# Altium PCB DASHBOARD.PcbDoc (part 1 of 2)
Units mm, origin at the board's own origin, x right, y up, seen from the top; angles counter-clockwise.
Board outline 200 x 60 mm, 2 copper layers (Top Layer, Bottom Layer); 94 components, 71 nets, 344 pads, 49 vias.
Unrouted connection lines stored in the file: 10.
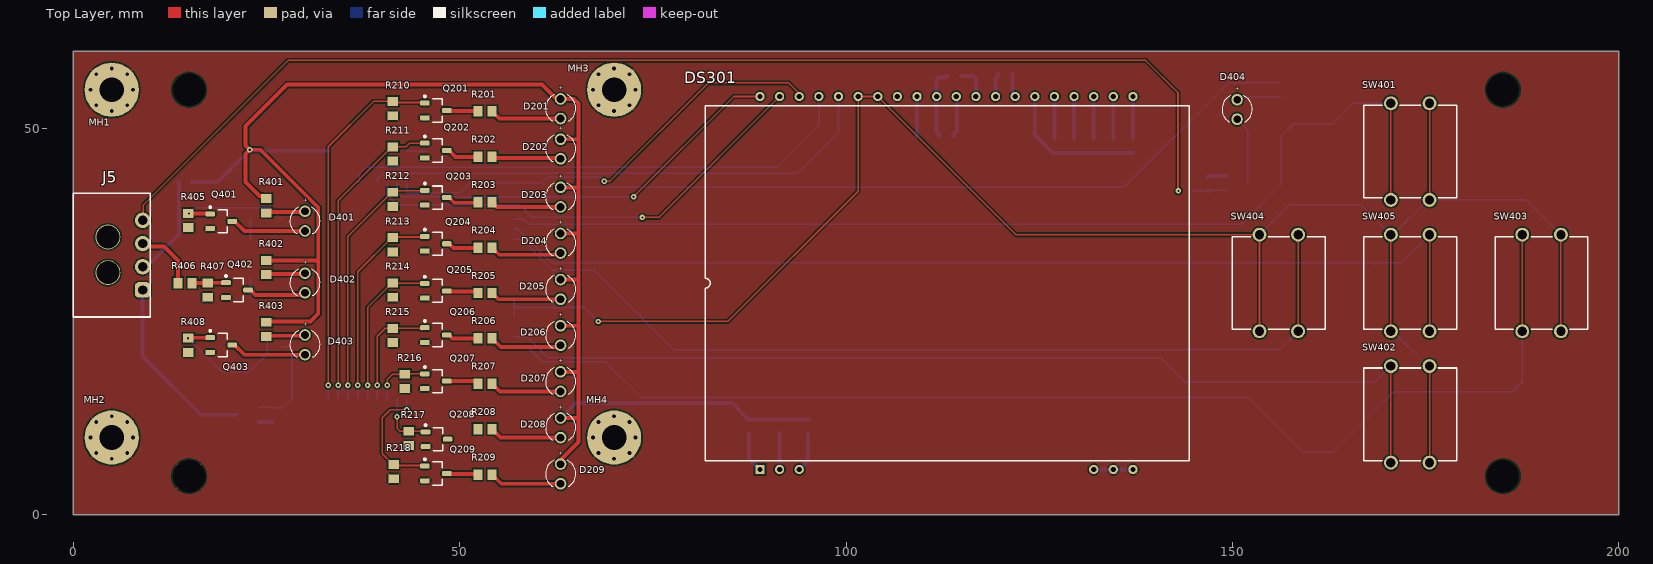
[diagram p0: Top Layer view]
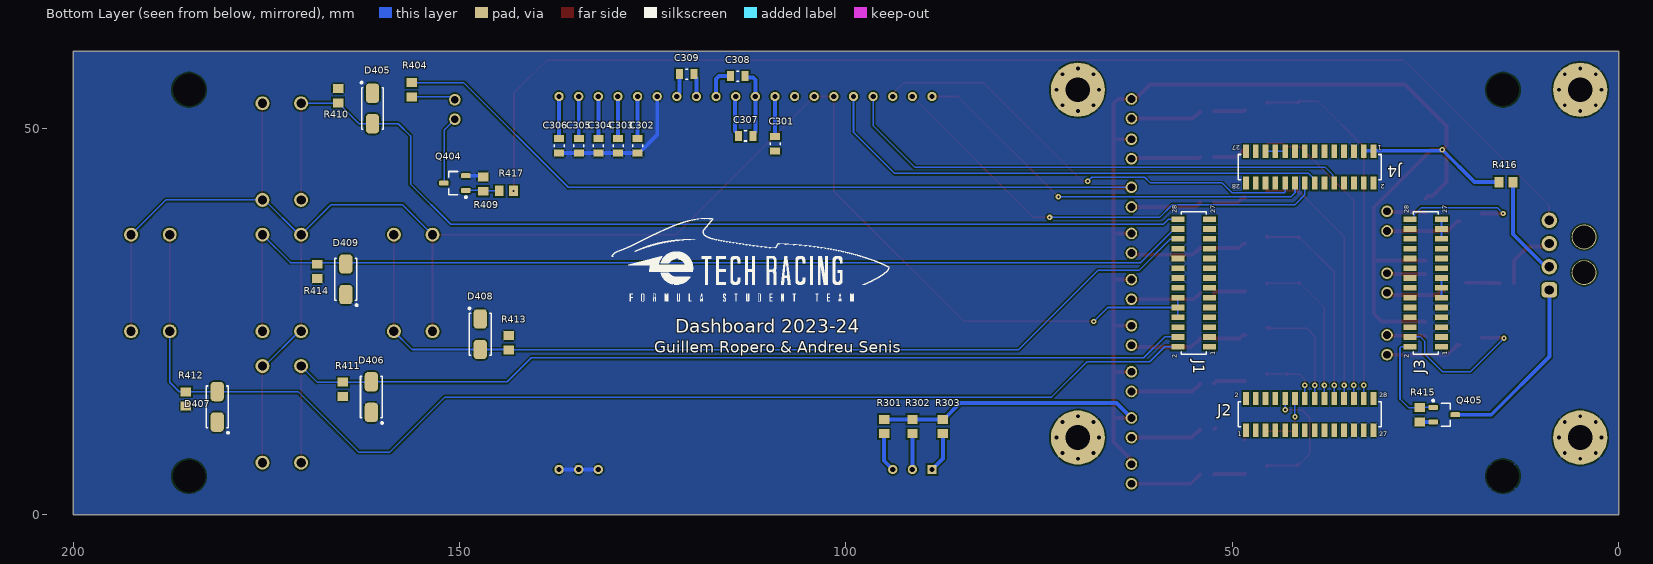
[diagram p1: Bottom Layer view, seen from below]
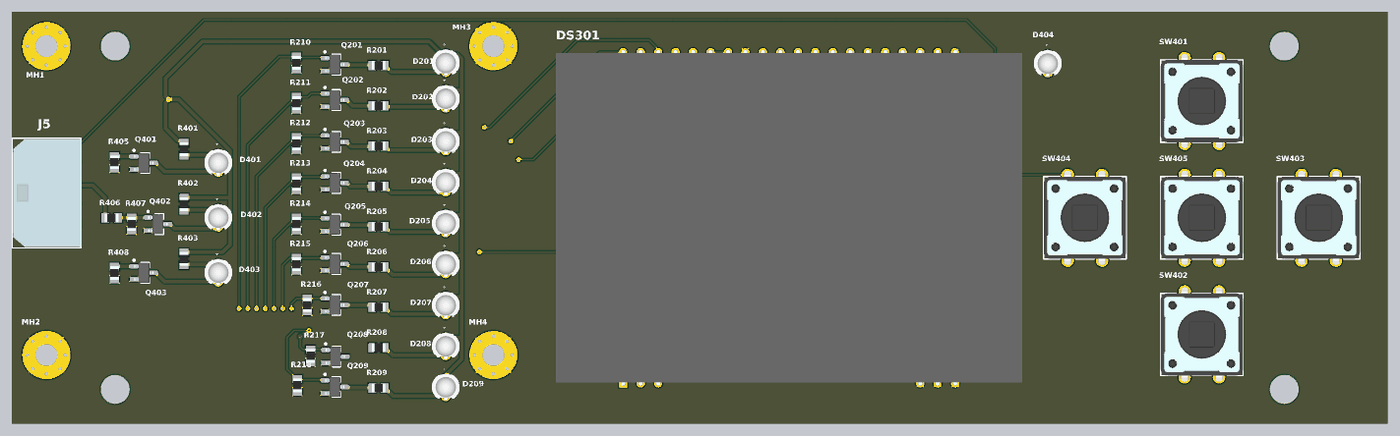
[diagram p2: 3D render of the assembled board from above, using the file's embedded part models]
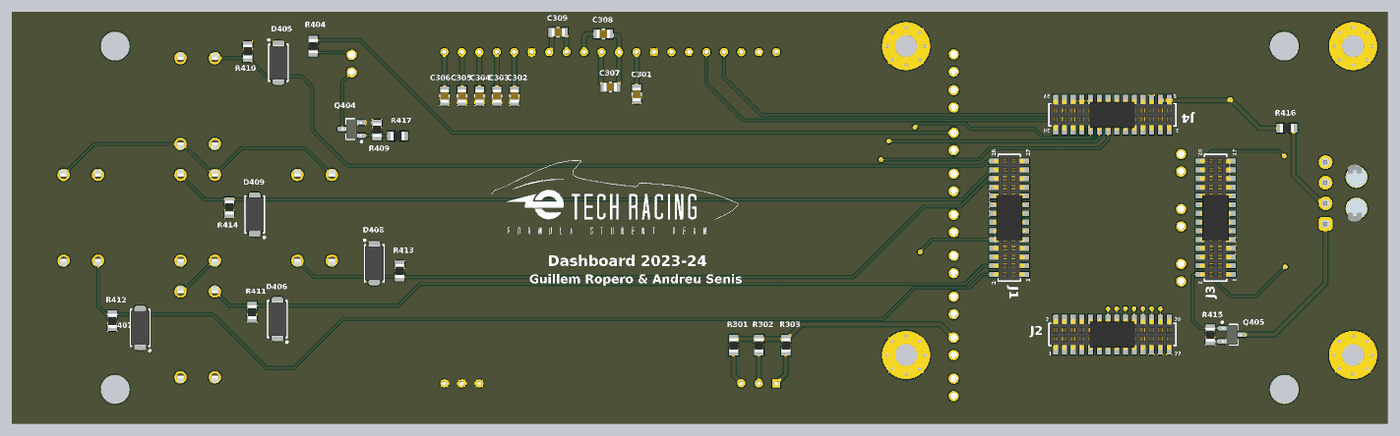
[diagram p3: 3D render of the assembled board from below, using the file's embedded part models]

## Layer stack, top to bottom
Top Solder: solder mask 0.0102, Solder Resist, Dk 3.5
Top Layer: signal copper 0.0356
Dielectric 1: dielectric 0.32, FR-4, Dk 4.8
Bottom Layer: signal copper 0.0356
Bottom Solder: solder mask 0.0102, Solder Resist, Dk 3.5

## Board outline
0,0 200,0 200,60 0,60

## Design rules (kind name [scope] priority, off if disabled: settings)
Clearance [All] p1: gap=0.2 ignorepadtopadclearanceinfootprint=FALSE
HoleSize [All] p1: absolutevalues=TRUE maxlimit=5 minlimit=0.3 maxpercent=80.000 minpercent=20.000
PlaneClearance [All] p1: clearance=0.5
PlaneConnect [All] p1: planeconnectstyle=Relief reliefexpansion=0.5 reliefentries=4 reliefconductorwidth=0.2 reliefairgap=0.2
PolygonConnect [All] p1: connectstyle=Relief reliefconductorwidth=0.2 reliefentries=4 polygonreliefangle="45 Angle" airgapwidth=0.2
RoutingVias [All] p1: holewidth=0.3 width=0.7 viastyle="Through Hole" minholewidth=0.3 minwidth=0.45 maxholewidth=2 maxwidth=3
SilkToSilkClearance [All] p1: silktosilkclearance=0
SolderMaskExpansion [All] p1: expansion=0.1 istentingtop=FALSE
UnRoutedNet [All] p1: checkbadconnections=TRUE
Width [All] p1: maxlimit=5 minlimit=0.1 preferedwidth=0.5
25 further rules are at their usual default settings.

## Classes and differential pairs
component class DASHBOARD: J1 J2 J3 J4 J5 MH1 MH2 MH3 MH4
component class Display: C301 C302 C303 C304 C305 C306 C307 C308 C309 DS301 R301 R302 R303
component class Peripherals: D401 D402 D403 D404 D405 D406 D407 D408 D409 Q401 Q402 Q403 Q404 Q405 R401 R402 R403 R404 R405 R406 R407 R408 R409 R410 R411 R412 R413 R414 R415 R416 R417 SW401 SW402 SW403 SW404 SW405
component class Bargraph: D201 D202 D203 D204 D205 D206 D207 D208 D209 Q201 Q202 Q203 Q204 Q205 Q206 Q207 Q208 Q209 R201 R202 R203 R204 R205 R206 R207 R208 R209 R210 R211 R212 R213 R214 R215 R216 R217 R218

## Components (designator, comment, footprint, x,y, rotation, side; value= is the part's Value field where it differs from the comment)
C301 "885012207103" C0805FNPC-R 109.172,48.006 r90 bottom
C302 "885012207103" C0805FNPC-R 126.952,47.752 r90 bottom
C303 "885012207103" C0805FNPC-R 129.492,47.752 r90 bottom
C304 "885012207103" C0805FNPC-R 132.032,47.752 r90 bottom
C305 "885012207103" C0805FNPC-R 134.572,47.752 r90 bottom
C306 "885012207103" C0805FNPC-R 137.112,47.752 r90 bottom
C307 "885012207103" C0805FNPC-R 112.982,49.022 r180 bottom
C308 "885012207103" C0805FNPC-R 113.998,56.769 r180 bottom
C309 "885012207103" C0805FNPC-R 120.602,57.023 r0 bottom
D201 "150080GS75000" LED-THT/WE/D3.9H10.5 63.072,52.537 r270 top locked
D202 "150080GS75000" LED-THT/WE/D3.9H10.5 63.072,47.33 r270 top locked
D203 "150080GS75000" LED-THT/WE/D3.9H10.5 63.072,41.107 r270 top locked
D204 "150080YS75000" LED-THT/WE/D3.9H10.5 63.072,35.138 r270 top locked
D205 "150080YS75000" LED-THT/WE/D3.9H10.5 63.072,29.169 r270 top locked
D206 "150080YS75000" LED-THT/WE/D3.9H10.5 63.072,23.2 r270 top locked
D207 "150080RS75000" LED-THT/WE/D3.9H10.5 63.072,17.231 r270 top locked
D208 "150080RS75000" LED-THT/WE/D3.9H10.5 63.072,11.262 r270 top locked
D209 "150080RS75000" LED-THT/WE/D3.9H10.5 63.072,5.293 r270 top locked
D401 "150080RS75000" LED-THT/WE/D3.9H10.5 30,38 r270 top
D402 "150080GS75000" LED-THT/WE/D3.9H10.5 30,30 r270 top
D403 "150080RS75000" LED-THT/WE/D3.9H10.5 30,22 r270 top
D404 "150080RS75000" LED-THT/WE/D3.9H10.5 150.606,52.451 r270 top
D405 "824501600" DTVS-DO-214AC 161.274,52.578 r90 bottom
D406 "824501600" DTVS-DO-214AC 161.417,15.24 r270 bottom
D407 "824501600" DTVS-DO-214AC 181.356,13.97 r270 bottom
D408 "824501600" DTVS-DO-214AC 147.32,23.368 r90 bottom
D409 "824501600" DTVS-DO-214AC 164.719,30.48 r270 bottom
DS301 "EA_DOGL128W-6" EA_DOGL128W-6 113,30 r0 top
J1 "62132821021" 62332821021 55,30 r90 bottom
J2 "62132821021" 62332821021 40,13 r180 bottom
J3 "62132821021" 62332821021 25,30 r90 bottom
J4 "62132821021" 62332821021 40,45 r0 bottom
J5 "436500400" J_MicroFit_1x4 5,33.6 r270 top
MH1 "Mounting_Hole_M3" Mounting_Hole_M3 5,55 r0 top
MH2 "Mounting_Hole_M3" Mounting_Hole_M3 5,10 r0 top
MH3 "Mounting_Hole_M3" Mounting_Hole_M3 70,55 r0 top locked
MH4 "Mounting_Hole_M3" Mounting_Hole_M3 70,10 r0 top locked
Q201 "CPH3455-TL-H" TRT-NCH-3/35-CPH 46.935,52.324 r0 top
Q202 "CPH3455-TL-H" TRT-NCH-3/35-CPH 46.935,47.142 r0 top
Q203 "CPH3455-TL-H" TRT-NCH-3/35-CPH 46.935,41.046 r0 top
Q204 "CPH3455-TL-H" TRT-NCH-3/35-CPH 46.935,35.077 r0 top
Q205 "CPH3455-TL-H" TRT-NCH-3/35-CPH 46.935,28.981 r0 top
Q206 "CPH3455-TL-H" TRT-NCH-3/35-CPH 46.935,23.266 r0 top
Q207 "CPH3455-TL-H" TRT-NCH-3/35-CPH 46.935,17.297 r0 top
Q208 "CPH3455-TL-H" TRT-NCH-3/35-CPH 47.028,9.783 r0 top
Q209 "CPH3455-TL-H" TRT-NCH-3/35-CPH 46.935,5.359 r0 top
Q401 "SQ2318BES-T1_GE3" TRT-NCH-3/35-CPH 19.163,37.983 r0 top
Q402 "SQ2318BES-T1_GE3" TRT-NCH-3/35-CPH 21.209,29.083 r0 top
Q403 "SQ2318BES-T1_GE3" TRT-NCH-3/35-CPH 19.163,21.983 r0 top
Q404 "SQ2318BES-T1_GE3" TRT-NCH-3/35-CPH 150.606,42.926 r0 bottom
Q405 "SQ2318BES-T1_GE3" TRT-NCH-3/35-CPH 22.606,12.954 r180 bottom
R201 "CRCW080550R0FKTA" R0805FTK 53.293,52.197 r0 top value=50R
R202 "CRCW080550R0FKTA" R0805FTK 53.293,46.323 r0 top value=50R
R203 "CRCW080550R0FKTA" R0805FTK 53.293,40.449 r0 top value=50R
R204 "CRCW080550R0FKTA" R0805FTK 53.293,34.576 r0 top value=50R
R205 "CRCW080550R0FKTA" R0805FTK 53.293,28.702 r0 top value=50R
R206 "CRCW080550R0FKTA" R0805FTK 53.293,22.828 r0 top value=50R
R207 "CRCW080550R0FKTA" R0805FTK 53.293,16.954 r0 top value=50R
R208 "CRCW080550R0FKTA" R0805FTK 53.293,11.081 r0 top value=50R
R209 "CRCW080550R0FKTA" R0805FTK 53.293,5.207 r0 top value=50R
R210 "CR0805-JW-103ELF" R0805FTK 41.355,52.561 r270 top
R211 "CR0805-JW-103ELF" R0805FTK 41.355,46.691 r270 top
R212 "CR0805-JW-103ELF" R0805FTK 41.355,40.82 r270 top
R213 "CR0805-JW-103ELF" R0805FTK 41.355,34.949 r270 top
R214 "CR0805-JW-103ELF" R0805FTK 41.355,29.079 r270 top
R215 "CR0805-JW-103ELF" R0805FTK 41.355,23.208 r270 top
R216 "CR0805-JW-103ELF" R0805FTK 42.926,17.272 r270 top
R217 "CR0805-JW-103ELF" R0805FTK 43.4,9.886 r270 top
R218 "CR0805-JW-103ELF" R0805FTK 41.482,5.596 r270 top
R301 "CRCW080550R0FKTA" R0805FTK 95.075,11.43 r90 bottom value=50R
R302 "CRCW080550R0FKTA" R0805FTK 91.392,11.43 r90 bottom value=50R
R303 "CRCW080550R0FKTA" R0805FTK 87.455,11.43 r90 bottom value=50R
R401 "CR0805-FX-1000ELF" R0805FTK 25,40 r270 top
R402 "CR0805-FX-1000ELF" R0805FTK 25,32 r270 top
R403 "CR0805-FX-1000ELF" R0805FTK 25,24 r270 top
R404 "CR0805-FX-1000ELF" R0805FTK 156.194,54.991 r270 bottom
R405 "CR0805-JW-103ELF" R0805FTK 14.91,38.083 r270 top
R406 "CR0805-FX-1000ELF" R0805FTK 14.478,29.972 r0 top
R407 "CR0805-JW-103ELF" R0805FTK 17.399,29.083 r90 top
R408 "CR0805-JW-103ELF" R0805FTK 14.91,21.954 r270 top
R409 "CR0805-JW-103ELF" R0805FTK 146.939,42.799 r90 bottom
R410 "CR0805-JW-103ELF" R0805FTK 165.719,54.229 r90 bottom
R411 "CR0805-JW-103ELF" R0805FTK 165.1,16.256 r270 bottom
R412 "CR0805-JW-103ELF" R0805FTK 185.42,14.986 r270 bottom
R413 "CR0805-JW-103ELF" R0805FTK 143.637,22.261 r90 bottom
R414 "CR0805-JW-103ELF" R0805FTK 168.402,31.496 r270 bottom
R415 "CR0805-JW-103ELF" R0805FTK 25.781,12.954 r270 bottom
R416 "CR0805-JW-102ELF" R0805FTK 14.605,43.053 r0 bottom
R417 "CR0805-JW-104ELF" R0805FTK 143.934,41.91 r0 bottom
SW401 "430456073736" SWITCH_12x12/4304x60737x6 173,47 r270 top
SW402 "430456073736" SWITCH_12x12/4304x60737x6 173,13 r270 top
SW403 "430456073736" SWITCH_12x12/4304x60737x6 190,30 r270 top
SW404 "430456073736" SWITCH_12x12/4304x60737x6 156,30 r90 top
SW405 "430456073736" SWITCH_12x12/4304x60737x6 173,30 r90 top

## Footprints (in the part's own frame and the unit in brackets; to place one, negate y for a bottom-side part, rotate by r counter-clockwise, add the part's x,y. Pads: shape width x height; smd on the part's side, far side on the other; paste and mask are expansions set on the pad)
62332821021 [mm] "Socket Header, Pitch 1.27 mm, SMT, Vertical, dual row, 28p"
  rect 0.74x1.7 smd: 1(-8.255,-2.05) 2(-8.255,2.05) 3(-6.985,-2.05) 4(-6.985,2.05) 5(-5.715,-2.05) 6(-5.715,2.05) 7(-4.445,-2.05) 8(-4.445,2.05) 9(-3.175,-2.05) 10(-3.175,2.05) 11(-1.905,-2.05) 12(-1.905,2.05) 13(-0.635,-2.05) 14(-0.635,2.05) 15(0.635,-2.05) 16(0.635,2.05) 17(1.905,-2.05) 18(1.905,2.05) 19(3.175,-2.05) 20(3.175,2.05) 21(4.445,-2.05) 22(4.445,2.05) 23(5.715,-2.05) 24(5.715,2.05) 25(6.985,-2.05) 26(6.985,2.05) 27(8.255,-2.05) 28(8.255,2.05)
  silkscreen extent -9.24,-1.62 9.24,1.63, body extent -9.09,-2.3 9.09,2.3, height 4.69
C0805FNPC-R [mm]
  rect 0.9x1.3 smd: 1(-0.95,0) 2(0.95,0)
  silkscreen extent -0.15,-0.65 0.15,0.65, body extent -1.03,-0.63 0.97,0.63, height 0.96
DTVS-DO-214AC [mm] "Molded Diode, 2-Leads, Body 5,11x2,67mm, IPC Medium Density"
  rrect50% 2.5x1.7 smd: 1(-1.975,0) 2(1.975,0)
  silkscreen extent -2.7,-1.4 3.47,1.53, body extent -2.56,-1.34 2.56,1.34, height 2.5
EA_DOGL128W-6 [mm]
  rect 1.2x1.2 hole 0.7: 1(-24.13,-24.13)
  round 1.2 hole 0.7: 2(-21.59,-24.13) 3(-19.05,-24.13) 18(19.05,-24.13) 19(21.59,-24.13) 20(24.13,-24.13) 21(24.13,24.13) 22(21.59,24.13) 23(19.05,24.13) 24(16.51,24.13) 25(13.97,24.13) 26(11.43,24.13) 27(8.89,24.13) 28(6.35,24.13) 29(3.81,24.13) 30(1.27,24.13) 31(-1.27,24.13) 32(-3.81,24.13) 33(-6.35,24.13) 34(-8.89,24.13) 35(-11.43,24.13) 36(-13.97,24.13) 37(-16.51,24.13) 38(-19.05,24.13) 39(-21.59,24.13) 40(-24.13,24.13)
  silkscreen extent -31.2,-23 31.4,22.93, body extent -33.9,-24.42 33.9,24.42, height 2.9
J_MicroFit_1x4 [mm]
  rrect50% 2x2 hole 1.2: 1(4.5,4)
  round 2 hole 1.2: 2(1.5,4) 3(-1.5,4) 4(-4.5,4)
  round 3.2 hole 3: ""(-2.35,-0.5) ""(2.26,-0.5)
  silkscreen extent -8,-5 8,5, body extent -7.83,-4.82 7.83,5.08, height 6.06
LED-THT/WE/D3.9H10.5 [mm] "THT Mono-color Round LED, 2-leads"
  round 1.5 hole 1: A(-1.27,0) K(1.27,0)
  silkscreen extent -1.79,-1.95 1.57,1.95, body extent -1.97,-1.95 1.85,1.95, height 10.55
Mounting_Hole_M3 [mm]
  round 7 hole 3.2: 1(0,0)
R0805FTK [mm] "Chip Resistor, 2-Leads, Body 2,00x1,25mm, IPC Medium Density"
  rect 1.15x1.35 smd: 1(-0.925,0) 2(0.925,0)
  body extent -1,-0.63 1,0.63, height 0.65
SWITCH_12x12/4304x60737x6 [mm] "12x12mm washable Tact Switch, THT version"
  round 1.8 hole 1.2: A1(-6.25,2.5) A2(6.25,2.5) B1(-6.25,-2.5) B2(6.25,-2.5)
  silkscreen extent -6,-6 6,6, body extent -6.99,-6 6.99,6, height 7.35
TRT-NCH-3/35-CPH [mm] "SOT23, 3-Leads, Body 2,90x2,80mm, Pitch 0,95mm, IPC Low Density"
  rrect50% 1.25x0.65 smd: D(1.425,0) G(-1.425,0.95) S(-1.425,-0.95)
  silkscreen extent -1.55,-1.5 0.8,1.95, body extent -1.4,-1.45 1.4,1.45, height 1.06

## Part data
C301 C302 C303 C304 C305 C306 C307 C308 C309: library part C1u-50V-0805FNPC-X7R, "Multilayer Ceramic Capacitor, Wcap-Csgp Series, 1 F, 10%, X7R, 50 V, 0805 [2012 Metric] Rohs Compliant: Yes", Capacitance=1uF, Case Code (Imperial)=0805, Case Code (Metric)=2012, Dielectric=X7R, Manufacturer 1="Wurth Electronics", Max Operating Temperature=85°C, Min Operating Temperature=-55°C, Supplier Part Number 1=1813523, Tolerance=10%, Voltage Rating=50V, .Creator=GP, Case/Package=0805, Category="Ceramic Capacitors", ComponentLink1Description=http://www.farnell.com/datasheets/1958501.pdf?src-supplier=Farnell, ComponentLink1URL=http://www.farnell.com/datasheets/1958501.pdf?src-supplier=Farnell, ComponentLink2Description=http://www.farnell.com/datasheets/1958501.pdf?src-supplier=Element14, ComponentLink2URL=http://www.farnell.com/datasheets/1958501.pdf?src-supplier=Element14, ComponentLink3Description=https://katalog.we-online.de/pbs/datasheet/885012107003.pdf?src-supplier=Digi-Key, ComponentLink3URL=https://katalog.we-online.de/pbs/datasheet/885012107003.pdf?src-supplier=Digi-Key, ComponentLink4Description=http://www.farnell.com/datasheets/1958501.pdf?src-supplier=Newark, ComponentLink4URL=http://www.farnell.com/datasheets/1958501.pdf?src-supplier=Newark, Length=0.079inch, Manufacturer Part Number 1=885012207103, Mount="Surface Mount", Packaging="Cut Tape", Pricing 1="50=0,27200, 250=0,25300, 500=0,22800, 1250=0,20100, 2500=0,17100 (GBP)", REACH SVHC=Unknown, RoHS=Yes, RoHS Compliant=Yes, Stock 1=5100, Supplier 1=RSComponents, Thickness=0.053inch, Voltage Rating (DC)=50V, Width=0.049inch
D201 D202 D203 D402: library part LEDGS-THT, "Led, Green, 520 Nm, 3.2 V, 30 Ma, 450 Mcd Rohs Compliant: Yes", Case Code (Imperial)=0805, Case Code (Metric)=2012, Color=Green, Forward Current=30mA, Forward Voltage=3.2V, Manufacturer 1="Wurth Electronics", Max Operating Temperature=85°C, Min Operating Temperature=-40°C, Package Quantity=4000, Supplier Part Number 1=8154221, Test Current=20mA, .Creator=GP, Case/Package=0805, Category=LEDs, ComponentLink1Description=Datasheet, ComponentLink1URL=https://www.we-online.com/catalog/datasheet/150080GS75000.pdf, ComponentLink2Description="Where buy it", ComponentLink2URL=https://katalog.we-online.de/en/led/WL-SMCW/150080GS75000, ComponentLink3Description=https://datasheet.ciiva.com/29563/150080gs75000-29563008.pdf?src-supplier=Digi-Key, ComponentLink3URL=https://datasheet.ciiva.com/29563/150080gs75000-29563008.pdf?src-supplier=Digi-Key, ComponentLink4Description=https://datasheet.ciiva.com/29279/759434-da-01-en-chipled-0805-w-kl-gruen-150080gs75000-29279039.pdf?src-supplier=Conrad, ComponentLink4URL=https://datasheet.ciiva.com/29279/759434-da-01-en-chipled-0805-w-kl-gruen-150080gs75000-29279039.pdf?src-supplier=Conrad, Dominant Wavelength=520nm, Height=0.7mm, Length=2mm, Lens Style=Clear,Rectangular, Luminous Intensity=450mcd, Manufacturer Part Number 1=150080GS75000, Mount="Surface Mount", Packaging="Cut Tape", Pricing 1="50=0,19300, 500=0,12900, 1000=0,12300, 2000=0,11700, 4000=0,11100 (USD)", REACH SVHC=Unknown, RoHS=Yes, RoHS Compliant=Yes, Stock 1=4350, Supplier 1=RSComponents, Viewing Angle=140°, Wavelength=520nm, Width=1.25mm
D204 D205 D206: library part LEDYS-THT, "2 V Yellow LED 2012 (0805) SMD, Wurth Elektronik WL-SMCW 150080YS75000", Case Code (Imperial)=0805, Case Code (Metric)=2012, Color=Yellow, Forward Current=30mA, Forward Voltage=2V, Manufacturer 1="Wurth Electronics", Max Operating Temperature=85°C, Min Operating Temperature=-40°C, Package Quantity=4000, Supplier Part Number 1=8154231, Test Current=20mA, .Creator=DR, Case/Package=0805, Category=LEDs, ComponentLink1Description=Datasheet, ComponentLink1URL=https://www.we-online.com/catalog/datasheet/150080YS75000.pdf, ComponentLink2Description="Where buy it", ComponentLink2URL=https://katalog.we-online.de/en/led/WL-SMCW/150080YS75000, ComponentLink3Description=https://datasheet.ciiva.com/23843/150080ys75000-23843256.pdf?src-supplier=Newark, ComponentLink3URL=https://datasheet.ciiva.com/23843/150080ys75000-23843256.pdf?src-supplier=Newark, ComponentLink4Description=https://datasheet.ciiva.com/29279/759438-da-01-en-chipled-0805-w-kl-gelb-150080ys75000-29279034.pdf?src-supplier=Conrad, ComponentLink4URL=https://datasheet.ciiva.com/29279/759438-da-01-en-chipled-0805-w-kl-gelb-150080ys75000-29279034.pdf?src-supplier=Conrad, ComponentLink5Description=https://datasheet.ciiva.com/22656/1911353-22656971.pdf?src-supplier=Element14, ComponentLink5URL=https://datasheet.ciiva.com/22656/1911353-22656971.pdf?src-supplier=Element14, ComponentLink6Description=https://datasheet.ciiva.com/29563/150080ys75000-29563019.pdf?src-supplier=Digi-Key, ComponentLink6URL=https://datasheet.ciiva.com/29563/150080ys75000-29563019.pdf?src-supplier=Digi-Key, ComponentLink7Description=https://datasheet.ciiva.com/29563/150080ys75000-29563020.pdf?src-supplier=Digi-Key, ComponentLink7URL=https://datasheet.ciiva.com/29563/150080ys75000-29563020.pdf?src-supplier=Digi-Key, ComponentLink8Description=https://datasheet.ciiva.com/29563/150080ys75000-29563021.pdf?src-supplier=Digi-Key, ComponentLink8URL=https://datasheet.ciiva.com/29563/150080ys75000-29563021.pdf?src-supplier=Digi-Key, Dominant Wavelength=590nm, Height=0.7mm, Length=2mm, Lens Style=Clear,Rectangular, Luminous Intensity=120mcd, Manufacturer Part Number 1=150080YS75000, Mount="Surface Mount", Packaging="Tape and Reel", Pricing 1="50=0,19300, 500=0,12900, 750=0,12300, 1500=0,11700, 3000=0,11100 (USD)", REACH SVHC=Unknown, RoHS=Yes, RoHS Compliant=Yes, Stock 1=2100, Supplier 1=RSComponents, Viewing Angle=140°, Wavelength=590nm, Width=1.25mm
D207 D208 D209 D401 D403 D404: library part LEDRS-THT, "0805(H=0.8mm) 红色 高亮 λD=625nm VF=2V IF=30mA PD=72mW", Case Code (Imperial)=0805, Case Code (Metric)=2012, Color=Red, Forward Current=30mA, Forward Voltage=2V, Manufacturer 1="Wurth Electronics", Max Operating Temperature=85°C, Min Operating Temperature=-40°C, Package Quantity=4000, Supplier Part Number 1=8154225P, Test Current=20mA, .Creator=DR, Case/Package=0805, Category=LEDs, ComponentLink1Description=Datasheet, ComponentLink1URL=https://www.we-online.com/catalog/datasheet/150080RS75000.pdf, ComponentLink2Description="Where buy it", ComponentLink2URL=https://katalog.we-online.de/en/led/WL-SMCW/150080RS75000, ComponentLink3Description=https://datasheet.ciiva.com/22656/150080rs75000-22656961.pdf?src-supplier=Element14, ComponentLink3URL=https://datasheet.ciiva.com/22656/150080rs75000-22656961.pdf?src-supplier=Element14, ComponentLink4Description=https://datasheet.ciiva.com/29279/759435-da-01-en-chipled-0805-w-kl-rot-150080rs75000-29279032.pdf?src-supplier=Conrad, ComponentLink4URL=https://datasheet.ciiva.com/29279/759435-da-01-en-chipled-0805-w-kl-rot-150080rs75000-29279032.pdf?src-supplier=Conrad, Dominant Wavelength=625nm, Height=0.7mm, Length=2mm, Lens Style=Clear,Rectangular, Luminous Intensity=150mcd, Manufacturer Part Number 1=150080RS75000, Mount="Surface Mount", Packaging="Tape and Reel", Pricing 1="50=0,19300, 500=0,12900, 1000=0,12300, 2000=0,11700, 4000=0,11100 (USD)", REACH SVHC=Unknown, RoHS=Yes, RoHS Compliant=Yes, Stock 1=1, Supplier 1=RSComponents, Viewing Angle=140°, Wavelength=625nm, Width=1.25mm
D405 D406 D407 D408 D409: library part DTVS-6V-DO-214AC, "TVS diode [Würth Elektronik] 824501600 TVS diode", Clamping Voltage=10.3V, Manufacturer="Wurth Electronics", Max Breakdown Voltage=7.02V, Max Operating Temperature=150°C, Min Operating Temperature=-65°C, Peak Pulse Current=38.8A, Peak Pulse Power=400W, Power Line Protection=No, Resistor Type=Zener, Reverse Standoff Voltage=6V, Supplier Part Number 1=710-824501600, .Creator=DO, Category="TVS Diodes", ComponentLink1Description="Where buy it", ComponentLink1URL=https://www.we-online.com/catalog/en/WE-TVSP?sq=824501600#824501600, ComponentLink2Description=http://www.farnell.com/datasheets/2036401.pdf?src-supplier=Element14, ComponentLink2URL=http://www.farnell.com/datasheets/2036401.pdf?src-supplier=Element14, ComponentLink3Description=https://katalog.we-online.de/pbs/datasheet/824501600.pdf?src-supplier=Digi-Key, ComponentLink3URL=https://katalog.we-online.de/pbs/datasheet/824501600.pdf?src-supplier=Digi-Key, Manufacturer Part Number=824501600, Min Breakdown Voltage=7.02V, Mount="Surface Mount", Number of Bidirectional Channels=1, Number of Pins=2, Packaging="Cut Tape", Polarity=Bidirectional, Pricing 1="1=0,28000, 10=0,26100, 50=0,26100, 100=0,23400, 500=0,20400, 1000=0,17400, 10000=0,17400 (USD)", REACH SVHC=Unknown, RoHS=Yes, RoHS Compliant=Yes, Stock 1=780, Supplier 1=Mouser
DS301: "LCD Graphic Display Modules & Accessories FSTN (+) Transflectv White Background", Background Color=White, Manufacturer="Electronic Assembly", Manufacturer Part Number=EADOGL128W-6, Manufacturer_Name="Electronic Assembly GmbH", Manufacturer_Part_Number="EA DOGL128W-6", Max Operating Temperature=70°C, Min Operating Temperature=-20°C, Nominal Supply Current=270uA, Package Quantity=16, Supplier Part Number 1=1481-1058-ND, .Creator=GP, Category=Display, ComponentLink1Description=Datasheet, ComponentLink1URL=http://www.lcd-module.com/eng/pdf/grafik/dogl128-6e.pdf, ComponentLink2Description="Where buy it", ComponentLink3Description=https://datasheet.ciiva.com/14100/dogl128-6-eng-tds-14100350.pdf?src-supplier=Distrelec, ComponentLink3URL=https://datasheet.ciiva.com/14100/dogl128-6-eng-tds-14100350.pdf?src-supplier=Distrelec, Height=2.8mm, Illumination Color=White, Interface=SPI, Resolution (height)=64pixel, Resolution (width)=128pixel, RoHS=No, Supplier 1=Digi-Key, Viewing Area (height)=35mm, Viewing Area (width)=64mm, Width=67.8mm
J1 J2 J3 J4: "WR-PHD Pin Header, SMT, Vertical, pitch 1.27mm, 2 Row, 28P", Contact Resistance=20mΩ, Manufacturer="Wurth Elektronik", Operating Temperature Max=105°C, Operating Temperature Min=-40°C, Rated Current=1A, Withstanding Voltage=500V, Working Voltage=100V, Category="Board-to-Board Connectors", ComponentLink1Description="Website Link", ComponentLink1URL=https://www.we-online.com/redexpert/article/62132821021?ad, ComponentLink2Description="Datasheet Link", ComponentLink2URL=https://www.we-online.com/redexpert/spec/62132821021?ad, Gender="Pin Header", Manufacturer Part Number=62132821021, Match Code=WR-PHD, Mount="Surface Mount", Number of Pins=28, Number of Rows=2, Orientation=Vertical, Packaging="Tape and Reel", Pitch=1.27mm
J5: library part J_MicroFit_1x4, "Connector Wire to Board Header 4 Position 3mm Solder Right Angle Thru-Hole Tray", Color=Black, Contact Resistance=10mR, Current Rating=5A, Flammability Rating="UL94 V-0", Manufacturer 1=Molex, Manufacturer Part Number 1=43650-0400, Max Operating Temperature=105°C, Max Voltage Rating (AC)=600V, Min Operating Temperature=-40°C, Package Quantity=2380, Supplier Part Number 1=1012232, Voltage Rating (DC)=250V, Category="Headers and Wire Housings", ComponentLink1Description=https://datasheet.ciiva.com/19462/884184-19462234.pdf?src-supplier=Jameco, ComponentLink1URL=https://datasheet.ciiva.com/19462/884184-19462234.pdf?src-supplier=Jameco, ComponentLink2Description=https://datasheet.ciiva.com/5151/0436500400-pcb-headers-148663-5151881.pdf?src-supplier=Mouser, ComponentLink2URL=https://datasheet.ciiva.com/5151/0436500400-pcb-headers-148663-5151881.pdf?src-supplier=Mouser, ComponentLink3Description=https://datasheet.ciiva.com/16085/0436500400-pcb-headers-16085752.pdf?src-supplier=Onlinecomponents.com, ComponentLink3URL=https://datasheet.ciiva.com/16085/0436500400-pcb-headers-16085752.pdf?src-supplier=Onlinecomponents.com, ComponentLink4Description=https://datasheet.ciiva.com/11748/0900766b80d6135b-11748178.pdf?src-supplier=RSComponents, ComponentLink4URL=https://datasheet.ciiva.com/11748/0900766b80d6135b-11748178.pdf?src-supplier=RSComponents, ComponentLink5Description=https://datasheet.ciiva.com/30221/142510436500400-pcb-headers-30221164.pdf?src-supplier=Onlinecomponents.com, ComponentLink5URL=https://datasheet.ciiva.com/30221/142510436500400-pcb-headers-30221164.pdf?src-supplier=Onlinecomponents.com, ComponentLink6Description=https://datasheet.ciiva.com/17080/70266896-17080471.pdf?src-supplier=Allied+Electronics, ComponentLink6URL=https://datasheet.ciiva.com/17080/70266896-17080471.pdf?src-supplier=Allied+Electronics, ComponentLink7Description=https://datasheet.ciiva.com/7094/1946229-7094763.pdf?src-supplier=Newark, ComponentLink7URL=https://datasheet.ciiva.com/7094/1946229-7094763.pdf?src-supplier=Newark, ComponentLink8Description=https://datasheet.ciiva.com/9449/0436500400-pcb-headers-9449446.pdf?src-supplier=Avnet, ComponentLink8URL=https://datasheet.ciiva.com/9449/0436500400-pcb-headers-9449446.pdf?src-supplier=Avnet, Connector Type=Plug, Contact Material="Brass,Copper Alloy", Contact Plating=Tin, Depth=3.6mm, Gender=Male, Glow Wire Compliant=Compliant, Halogen Free="Low Halogen", Height=4.5mm, Housing Color=Black, Housing Material=Thermoplastic, Lead Free="Contains Lead", Length=14.86mm, Mount="Through Hole,Cable", Number of Circuits=4, Number of Contacts=4, Number of Positions=4, Number of Rows=1, Orientation="Right Angle", Packaging=Tray, Pitch=3mm, Pricing 1="1=1,24000, 10=1,22000, 50=1,19000, 100=1,17000, 500=1,14000, 1000=1,12000 (EUR)", Radiation Hardening=No, RoHS=Yes, RoHS Compliant=Yes, Series=43650, Stock 1=4623, Supplier 1=Farnell, Termination=Solder, Voltage Rating=600V
Q201 Q202 Q203 Q204 Q205 Q206 Q207 Q208 Q209: library part TRT-NCH-3/35-CPH, "CPH3455-TL-H N-channel MOSFET Transistor; 3 A; 35 V; 3-Pin CPH", Case/Package=SC, Continuous Drain Current (ID)=3A, Drain to Source Breakdown Voltage=35V, Drain to Source Resistance=108mR, Gate to Source Voltage (Vgs)=20V, Input Capacitance=186pF, Manufacturer="ON Semiconductor", Max Operating Temperature=150°C, Max Power Dissipation=1W, Min Operating Temperature=-55°C, Package Quantity=3000, Supplier Part Number 1=8009989, .Creator=GP, Category=Transistor, ComponentLink1Description=Datasheet, ComponentLink1URL=https://docs.rs-online.com/5847/0900766b812d514d.pdf, ComponentLink2Description="Where buy it", ComponentLink2URL=https://es.rs-online.com/web/p/mosfet/8009989, ComponentLink3Description=https://datasheet.ciiva.com/947/cph3455-d-947201.pdf?src-supplier=Digi-Key, ComponentLink3URL=https://datasheet.ciiva.com/947/cph3455-d-947201.pdf?src-supplier=Digi-Key, ComponentLink4Description=https://datasheet.ciiva.com/4444/cph3455-d-91653-4444616.pdf?src-supplier=Mouser, ComponentLink4URL=https://datasheet.ciiva.com/4444/cph3455-d-91653-4444616.pdf?src-supplier=Mouser, ComponentLink5Description=https://datasheet.ciiva.com/11164/cph3455-d-11164889.pdf?src-supplier=Avnet, ComponentLink5URL=https://datasheet.ciiva.com/11164/cph3455-d-11164889.pdf?src-supplier=Avnet, Drain to Source Voltage (Vdss)=35V, Element Configuration=Single, Fall Time=5.7ns, Halogen Free="Halogen Free", Height=0.9mm, Lead Free="Lead Free", Length=2.9mm, Manufacturer Part Number=CPH3455-TL-H, Number of Pins=3, Packaging="Tape and Reel", Polarity=N-CHANNEL, Power Dissipation=1W, Pricing 1="50=0,50400 (USD)", Rds On Max=104mR, Rise Time=4.7ns, RoHS=Yes, RoHS Compliant=Yes, Series=-, Stock 1=1, Supplier 1=RSComponents, Turn-Off Delay Time=15ns, Turn-On Delay Time=4.2ns, Width=1.6mm
Q401 Q402 Q403 Q404 Q405: library part TRT-NCH-8/40-SQ, "Automotive N-channel 40 V (d-s) 175C Mosfet SOT-23", Manufacturer 1=Vishay, Supplier Part Number 1=81AH9290, .Creator=DO, ComponentLink1Description="Where to buy", ComponentLink1URL=https://www.mouser.es/ProductDetail/Vishay-Siliconix/SQ2318BES-T1_GE3?qs=sPbYRqrBIVmyZcxPsDt0vA%3D%3D, ComponentLink2Description=Datasheet, ComponentLink2URL=https://www.mouser.es/datasheet/2/427/sq2318bes-1868475.pdf, Id=8A, Manufacturer Part Number 1=SQ2318BES-T1_GE3, Pricing 1="1=0,71500, 5=0,71500, 10=0,64400, 25=0,59000, 50=0,52500, 100=0,47100, 250=0,40800 (USD)", RoHS=No, Supplier 1=Newark, Vds=40V
R201 R202 R203 R204 R205 R206 R207 R208 R209 R301 R302 R303: library part R50-0805FTK, "Res Thick Film 0805 50 Ohm 1% 0.125W(1/8W) ±100ppm/C Pad SMD Automotive T/R", Case Code (Imperial)=0805, Case Code (Metric)=2012, Manufacturer="Vishay Dale", Max Operating Temperature=155°C, Min Operating Temperature=-55°C, Package Quantity=5000, Power Rating=125mW, Supplier Part Number 1=71-CRCW0805-50, Temperature Coefficient=100ppm/°C, Tolerance=1%, Voltage Rating=150V, Case/Package=0805, Category="Chip SMD Resistors", ComponentLink1Description=https://datasheet.ciiva.com/48525/dcrcw-48525895.pdf?src-supplier=Avnet, ComponentLink1URL=https://datasheet.ciiva.com/48525/dcrcw-48525895.pdf?src-supplier=Avnet, Contact Plating=Tin,Lead, Height=0.45mm, Lead Free="Contains Lead", Length=2mm, Manufacturer Part Number=CRCW080550R0FKTA, Packaging="Tape and Reel", Pricing 1="1=0,25, 10=0,204, 50=0,204, 100=0,08, 1000=0,033, 10000=0,026 (USD)", RoHS=No, RoHS Compliant=No, Series=CRCW, Stock 1=38245, Supplier 1=Mouser, Weight=0.000194oz, Width=1.25mm
R210 R211 R212 R213 R214 R215 R216 R217 R218 R405 R407 R408 R409 R410 R411 R412 R413 R414 R415: library part R10k-0805FTK, "BOURNS         CR0805-JW-103ELF            Surface Mount Chip Resistor, Thick Film, CR Series, 10 kohm, 125 mW,  5%, 150 V", Case Code (Imperial)=0805, Case Code (Metric)=2012, Manufacturer 1=Bourns, Max Operating Temperature=155°C, Max Power Dissipation=125mW, Min Operating Temperature=-55°C, Package Quantity=1, Resistance=10kR, Resistance Tolerance=5%, Resistor Type="Thick Film", Temperature Coefficient=200ppm/°C, Voltage Rating=150V, Voltage Rating (DC)=100V, .Creator=DR, Case/Package=0805, Category="Chip SMD Resistors", ComponentLink1Description=https://datasheet.ciiva.com/11821/0900766b80fcdb72-11821135.pdf?src-supplier=RSComponents, ComponentLink1URL=https://datasheet.ciiva.com/11821/0900766b80fcdb72-11821135.pdf?src-supplier=RSComponents, ComponentLink2Description=https://datasheet.ciiva.com/9122/chpreztr-9122374.pdf?src-supplier=Avnet, ComponentLink2URL=https://datasheet.ciiva.com/9122/chpreztr-9122374.pdf?src-supplier=Avnet, ComponentLink3Description=https://datasheet.ciiva.com/22693/1902866-22693254.pdf?src-supplier=Element14, ComponentLink3URL=https://datasheet.ciiva.com/22693/1902866-22693254.pdf?src-supplier=Element14, ComponentLink4Description=https://datasheet.ciiva.com/7986/691949-7986187.pdf?src-supplier=Element14, ComponentLink4URL=https://datasheet.ciiva.com/7986/691949-7986187.pdf?src-supplier=Element14, ComponentLink5Description=https://datasheet.ciiva.com/30065/159chpreztr-30065976.pdf?src-supplier=Onlinecomponents.com, ComponentLink5URL=https://datasheet.ciiva.com/30065/159chpreztr-30065976.pdf?src-supplier=Onlinecomponents.com, ComponentLink6Description=https://datasheet.ciiva.com/16783/70154685-16783482.pdf?src-supplier=Allied+Electronics, ComponentLink6URL=https://datasheet.ciiva.com/16783/70154685-16783482.pdf?src-supplier=Allied+Electronics, ComponentLink7Description=https://datasheet.ciiva.com/5548/chpreztr-5548491.pdf?src-supplier=Mouser, ComponentLink7URL=https://datasheet.ciiva.com/5548/chpreztr-5548491.pdf?src-supplier=Mouser, ComponentLink8Description=https://datasheet.ciiva.com/6559/chpreztr-6559900.pdf?src-supplier=Digi-Key, ComponentLink8URL=https://datasheet.ciiva.com/6559/chpreztr-6559900.pdf?src-supplier=Digi-Key, ComponentLink9Description=https://datasheet.ciiva.com/6559/chpreztr-6559901.pdf?src-supplier=Digi-Key, ComponentLink9URL=https://datasheet.ciiva.com/6559/chpreztr-6559901.pdf?src-supplier=Digi-Key, ComponentLink10Description=https://datasheet.ciiva.com/7985/1856384-7985869.pdf?src-supplier=Element14, ComponentLink10URL=https://datasheet.ciiva.com/7985/1856384-7985869.pdf?src-supplier=Element14, ComponentLink11Description=https://datasheet.ciiva.com/48692/001055517-da-01-en-smd-wid-cr0805-jw-103elf-10k-ohm-1-8w-48692118.pdf?src-supplier=Conrad, ComponentLink11URL=https://datasheet.ciiva.com/48692/001055517-da-01-en-smd-wid-cr0805-jw-103elf-10k-ohm-1-8w-48692118.pdf?src-supplier=Conrad, Construction=Rectangular, Contact Plating=Tin, Depth=1.25mm, Features="Moisture Resistant", Height=0.5mm, Length=2mm, Manufacturer Part Number 1=CR0805-JW-103ELF, Military Standard=Not, Mount="Surface Mount", Number of Pins=2, Number of Terminations=2, Packaging="Tape and Reel", Power Rating=125mW, Pricing 1="1=0,05790, 10=0,01540, 25=0,01340, 100=0,00340 (USD)", Radiation Hardening=No, REACH SVHC="No SVHC", RoHS=Yes, RoHS Compliant=Yes, Series=CR0805, Stock 1=57566, Supplier 1="Arrow Electronics", Supplier Part Number 1=CR0805-JW-103ELF, Technology="THICK FILM", Termination=SMD/SMT, Thickness=508um, Tolerance=5%, Width=1.25mm
R401 R402 R403 R404 R406: library part R100-0805FTK, "Res Thick Film 0805 100 Ohm 1% 1/8W ±100ppm/°C Molded SMD SMD Paper Tape on Plastic Reel", Case Code (Imperial)=0805, Case Code (Metric)=2012, Manufacturer 1=Bourns, Max Operating Temperature=155°C, Max Power Dissipation=125mW, Min Operating Temperature=-55°C, Package Quantity=1, Resistance=100R, Resistance Tolerance=1%, Resistor Type="Thick Film", Temperature Coefficient=100ppm/°C, Voltage Rating=150V, .Creator=DR, Case/Package=0805, Category="Chip SMD Resistors", ComponentLink1Description=https://datasheet.ciiva.com/11809/0900766b80fcdb72-11809178.pdf?src-supplier=RSComponents, ComponentLink1URL=https://datasheet.ciiva.com/11809/0900766b80fcdb72-11809178.pdf?src-supplier=RSComponents, ComponentLink2Description=https://datasheet.ciiva.com/6547/chpreztr-6547413.pdf?src-supplier=Digi-Key, ComponentLink2URL=https://datasheet.ciiva.com/6547/chpreztr-6547413.pdf?src-supplier=Digi-Key, ComponentLink3Description=https://datasheet.ciiva.com/6547/chpreztr-6547414.pdf?src-supplier=Digi-Key, ComponentLink3URL=https://datasheet.ciiva.com/6547/chpreztr-6547414.pdf?src-supplier=Digi-Key, ComponentLink4Description=https://datasheet.ciiva.com/6547/chpreztr-6547415.pdf?src-supplier=Digi-Key, ComponentLink4URL=https://datasheet.ciiva.com/6547/chpreztr-6547415.pdf?src-supplier=Digi-Key, ComponentLink5Description=https://datasheet.ciiva.com/9120/chpreztr-9120744.pdf?src-supplier=Avnet, ComponentLink5URL=https://datasheet.ciiva.com/9120/chpreztr-9120744.pdf?src-supplier=Avnet, Construction=Rectangular, Contact Plating=Tin, Depth=1.25mm, Features="Moisture Resistant", Height=0.5mm, Length=2mm, Manufacturer Part Number 1=CR0805-FX-1000ELF, Military Standard=Not, Mount="Surface Mount", Number of Pins=2, Number of Terminations=2, Packaging="Tape and Reel", Power Rating=125mW, Pricing 1="1=0,05840, 10=0,03430, 25=0,01780, 100=0,00750, 250=0,00560, 500=0,00490, 3000=0,00470 (USD)", Radiation Hardening=No, REACH SVHC="No SVHC", RoHS=Yes, RoHS Compliant=Yes, Series=CR0805, Stock 1=49802, Supplier 1="Arrow Electronics", Supplier Part Number 1=CR0805-FX-1000ELF, Technology="THICK FILM", Termination=SMD/SMT, Thickness=508um, Tolerance=1%, Voltage Rating (DC)=150V, Width=1.25mm
R416: library part R1k-0805FTK, "Res Thick Film 0805 1K Ohm 5% 1/8W ±200ppm/°C Molded SMD SMD Paper Tape on Plastic Reel", Case Code (Imperial)=0805, Case Code (Metric)=2012, Manufacturer 1=Bourns, Max Operating Temperature=155°C, Max Power Dissipation=125mW, Min Operating Temperature=-55°C, Package Quantity=1, Resistance=1kR, Resistor Type="Thick Film", Temperature Coefficient=200ppm/°C, Tolerance=5%, Voltage Rating=150V, .Creator=GP, Case/Package=0805, Category="Chip SMD Resistors", ComponentLink1Description=https://datasheet.ciiva.com/11821/0900766b80fcdb72-11821134.pdf?src-supplier=RSComponents, ComponentLink1URL=https://datasheet.ciiva.com/11821/0900766b80fcdb72-11821134.pdf?src-supplier=RSComponents, ComponentLink2Description=https://datasheet.ciiva.com/15225/getdatasheetpartid-78155-15225381.pdf?src-supplier=Verical, ComponentLink2URL=https://datasheet.ciiva.com/15225/getdatasheetpartid-78155-15225381.pdf?src-supplier=Verical, ComponentLink3Description=https://datasheet.ciiva.com/22693/1902866-22693253.pdf?src-supplier=Element14, ComponentLink3URL=https://datasheet.ciiva.com/22693/1902866-22693253.pdf?src-supplier=Element14, ComponentLink4Description=https://datasheet.ciiva.com/7986/1856384-7986184.pdf?src-supplier=Element14, ComponentLink4URL=https://datasheet.ciiva.com/7986/1856384-7986184.pdf?src-supplier=Element14, ComponentLink5Description=https://datasheet.ciiva.com/7985/1856384-7985867.pdf?src-supplier=Element14, ComponentLink5URL=https://datasheet.ciiva.com/7985/1856384-7985867.pdf?src-supplier=Element14, ComponentLink6Description=https://datasheet.ciiva.com/30242/159chpreztr-30242765.pdf?src-supplier=Onlinecomponents.com, ComponentLink6URL=https://datasheet.ciiva.com/30242/159chpreztr-30242765.pdf?src-supplier=Onlinecomponents.com, ComponentLink7Description=https://datasheet.ciiva.com/6547/chpreztr-6547359.pdf?src-supplier=Digi-Key, ComponentLink7URL=https://datasheet.ciiva.com/6547/chpreztr-6547359.pdf?src-supplier=Digi-Key, Contact Plating=Tin, Depth=1.25mm, Features="Moisture Resistant", Height=0.5mm, Lead Free="Lead Free", Length=2mm, Manufacturer Part Number 1=CR0805-JW-102ELF, Military Standard=Not, Mount="Surface Mount", Number of Pins=2, Number of Terminations=2, Packaging="Tape and Reel", Power Rating=125mW, Pricing 1="1=0,05930, 10=0,03510, 25=0,01790, 100=0,00800, 250=0,00790, 500=0,00590, 1000=0,00360, 3000=0,00350, 6000=0,00250 (USD)", Radiation Hardening=No, REACH SVHC="No SVHC", RoHS=Yes, Stock 1=27510, Supplier 1="Arrow Electronics", Supplier Part Number 1=CR0805-JW-102ELF, Termination=SMD/SMT, Thickness=508um, Voltage Rating (DC)=150V, Width=1.25mm
R417: library part R10k-0805FTK, "BOURNS         CR0805-JW-103ELF            Surface Mount Chip Resistor, Thick Film, CR Series, 10 kohm, 125 mW,  5%, 150 V", Case Code (Imperial)=0805, Case Code (Metric)=2012, Manufacturer 1=Bourns, Manufacturer Part Number 1=CR0805-JW-103ELF, Max Operating Temperature=155°C, Max Power Dissipation=125mW, Min Operating Temperature=-55°C, Package Quantity=1, Resistance=10kR, Resistance Tolerance=5%, Resistor Type="Thick Film", Temperature Coefficient=200ppm/°C, Voltage Rating=150V, Voltage Rating (DC)=100V, .Creator=DR, Case/Package=0805, Category="Chip SMD Resistors", ComponentLink1Description=https://datasheet.ciiva.com/11821/0900766b80fcdb72-11821135.pdf?src-supplier=RSComponents, ComponentLink1URL=https://datasheet.ciiva.com/11821/0900766b80fcdb72-11821135.pdf?src-supplier=RSComponents, ComponentLink2Description=https://datasheet.ciiva.com/9122/chpreztr-9122374.pdf?src-supplier=Avnet, ComponentLink2URL=https://datasheet.ciiva.com/9122/chpreztr-9122374.pdf?src-supplier=Avnet, ComponentLink3Description=https://datasheet.ciiva.com/22693/1902866-22693254.pdf?src-supplier=Element14, ComponentLink3URL=https://datasheet.ciiva.com/22693/1902866-22693254.pdf?src-supplier=Element14, ComponentLink4Description=https://datasheet.ciiva.com/7986/691949-7986187.pdf?src-supplier=Element14, ComponentLink4URL=https://datasheet.ciiva.com/7986/691949-7986187.pdf?src-supplier=Element14, ComponentLink5Description=https://datasheet.ciiva.com/30065/159chpreztr-30065976.pdf?src-supplier=Onlinecomponents.com, ComponentLink5URL=https://datasheet.ciiva.com/30065/159chpreztr-30065976.pdf?src-supplier=Onlinecomponents.com, ComponentLink6Description=https://datasheet.ciiva.com/16783/70154685-16783482.pdf?src-supplier=Allied+Electronics, ComponentLink6URL=https://datasheet.ciiva.com/16783/70154685-16783482.pdf?src-supplier=Allied+Electronics, ComponentLink7Description=https://datasheet.ciiva.com/5548/chpreztr-5548491.pdf?src-supplier=Mouser, ComponentLink7URL=https://datasheet.ciiva.com/5548/chpreztr-5548491.pdf?src-supplier=Mouser, ComponentLink8Description=https://datasheet.ciiva.com/6559/chpreztr-6559900.pdf?src-supplier=Digi-Key, ComponentLink8URL=https://datasheet.ciiva.com/6559/chpreztr-6559900.pdf?src-supplier=Digi-Key, ComponentLink9Description=https://datasheet.ciiva.com/6559/chpreztr-6559901.pdf?src-supplier=Digi-Key, ComponentLink9URL=https://datasheet.ciiva.com/6559/chpreztr-6559901.pdf?src-supplier=Digi-Key, ComponentLink10Description=https://datasheet.ciiva.com/7985/1856384-7985869.pdf?src-supplier=Element14, ComponentLink10URL=https://datasheet.ciiva.com/7985/1856384-7985869.pdf?src-supplier=Element14, ComponentLink11Description=https://datasheet.ciiva.com/48692/001055517-da-01-en-smd-wid-cr0805-jw-103elf-10k-ohm-1-8w-48692118.pdf?src-supplier=Conrad, ComponentLink11URL=https://datasheet.ciiva.com/48692/001055517-da-01-en-smd-wid-cr0805-jw-103elf-10k-ohm-1-8w-48692118.pdf?src-supplier=Conrad, Construction=Rectangular, Contact Plating=Tin, Depth=1.25mm, Features="Moisture Resistant", Height=0.5mm, Length=2mm, Military Standard=Not, Mount="Surface Mount", Number of Pins=2, Number of Terminations=2, Packaging="Tape and Reel", Power Rating=125mW, Pricing 1="1=0,05790, 10=0,01540, 25=0,01340, 100=0,00340 (USD)", Radiation Hardening=No, REACH SVHC="No SVHC", RoHS=Yes, RoHS Compliant=Yes, Series=CR0805, Stock 1=57566, Supplier 1="Arrow Electronics", Supplier Part Number 1=CR0805-JW-103ELF, Technology="THICK FILM", Termination=SMD/SMT, Thickness=508um, Tolerance=5%, Width=1.25mm
SW401 SW402 SW403 SW404 SW405: library part Switch_THT_NO/430456073736, "WS-TATV THT Washable Tact Switch 12x12mm, SPST-NO, 12VDC, 50mA, 360g", Supplier Part Number 1=7856320, Supplier 1=Rs

## Free pads (board coordinates)
  round 0 hole 4.2: 14(15,5) 14(15,55) 14(185,5) 14(185,55)

## Via types
v1: diameter 0.7, hole 0.5, Top Layer to Bottom Layer, 32 vias
v2: diameter 0.7, hole 0.3, Top Layer to Bottom Layer, 16 vias
v3: diameter 0.7, hole 0.3, Top Layer to Bottom Layer, tented both sides, 1 vias

## Nets (pads, with @x,y where several pads share a name; then routed paths per layer and width w, separated by ;. In a path a pad name is that pad's centre, name@x,y a point inside that pad or via, vN(x,y) a via of type N, cw(c..) or ccw(c..) an arc to the next point about the centre after c; other vN are vias at no path point)
+3.3: DS301.34 DS301.35 J1.8 J1.10 J1.12 J2.1 J3.23 J3.25 J3.27 J4.28 SW401.A1 SW401.A2 SW402.A1 SW402.A2 SW403.A1 SW403.A2 SW404.A1 SW404.A2 SW405.A1 SW405.A2 | length 244.4
  Top Layer w0.2: v2(67.945,25.019) 84.709,25.019 101.57,41.88 DS301.35 DS301.34 121.99,36.25 SW404.A2 SW404.A1 ; SW405.A1 SW405.A2 ; SW402.A2 SW402.A1 ; SW401.A2 SW401.A1 ; SW403.A2 SW403.A1
  Bottom Layer w0.2: J3.23 J3.25 J3.27 ; 48.255,47.05 48.347,47.142 ; J1.8 J1.10 ; J1.12 J1.10 ; v2(67.945,25.019) 66.139,26.825 J1.10 ; SW404.A2 157.382,40.132 166.618,40.132 SW405.A2 170.75,36.25 175.25,40.75 SW401.A2 188,40.75 SW403.A1 ; SW405.A1 170.75,23.75 175.25,19.25 SW402.A1
+5: D201.A D202.A D203.A D204.A D205.A D206.A D207.A D208.A D209.A J2.13 J2.15 J3.11 J3.13 J3.15 J4.1 J4.3 R301.2 R302.2 R303.2 R401.1 R402.1 R403.1 R404.1 R416.2 | length 315.3
  Top Layer w0.5: R403.1 25.094,25.019 30.699,25.019 31.715,26.035 31.715,32.893 ; R402.1 31.683,32.925 31.715,32.893 ; R401.1 24.675,41.25 24.132,41.25 22.317,43.065 22.317,46.701 v2(22.86,47.244) ; D209.A 63.263,6.754 63.263,7.298 65.37,9.404 65.37,12.532 ; D208.A 65.37,12.532 ; D207.A 65.329,18.501 65.37,18.542 ; D206.A 65.37,24.47 ; D205.A 65.284,30.439 65.37,30.353 ; D204.A 65.284,36.408 65.37,36.322 ; D203.A 65.202,42.377 65.37,42.545 ; D202.A 65.329,48.6 65.37,48.641 ; D201.A 62.881,53.998 62.337,53.998 60.663,55.673 27.698,55.673 22.317,50.292 22.317,47.787 v2(22.86,47.244) ; D201.A@63.075,53.804 64.779,53.804 65.37,53.213 65.37,48.641 ; v2(22.86,47.244) 24.222,47.244 31.715,39.751 31.715,32.893 ; 65.37,12.532 65.37,18.542 ; 65.37,18.542 65.37,30.353 ; 65.37,30.353 65.37,36.322 ; 65.37,36.322 65.37,42.545 ; 65.37,42.545 65.37,48.641
  Top Layer w1: D201.A D201.A@63.075,53.804
  Bottom Layer w0.2: J3.11 J3.13 J3.15 ; D203.A 135.928,42.377 149.431,55.88 156.158,55.88 R404.1
  Bottom Layer w0.5: R416.2@15.403,43.053 18.669,43.053 v2(22.86,47.244) 22.914,47.244 23.041,47.117 J4.3@33.015,47.117 ; D208.A 65.018,14.478 85.232,14.478 87.355,12.355 R303.2 R302.2 R301.2
A0_LCD: DS301.38 J4.20 | length 59.3
  Top Layer w0.2: v2(68.707,43.18) 69.469,43.18 82.169,55.88 92.583,55.88 93.759,54.704 93.759,54.321 DS301.38
  Bottom Layer w0.2: J4.20 43.175,41.788 43.307,41.656 50.038,41.656 51.332,42.95 60.603,42.95 61.341,43.688 68.199,43.688 v2(68.707,43.18)
AMS_LED: J3.28 Q401.G R405.1 | length 16.1
  Top Layer w0.5: v2(14.986,38.989) 14.967,39.008 R405.1 14.948,38.971 17.701,38.971 Q401.G
  Bottom Layer w0.2: v2(14.986,38.989) 15.748,39.751 25.554,39.751 26.497,38.808 26.497,38.525 26.767,38.255 J3.28
BUZZER_CONTROL: Q405.G R415.1 | length 12.7
  Bottom Layer w0.2: Q405.G 25.756,13.904 R415.1 27.214,13.879 28.321,14.986 28.321,21.59 28.166,21.745 27.05,21.745
CLK_LCD: DS301.37 J4.10 | length 67
  Bottom Layer w0.2: J4.10 36.998,43.123 36.998,43.983 37.973,44.958 91.059,44.958 96.49,50.389 DS301.37
CS_LCD: DS301.40 J4.18 | length 53.8
  Top Layer w0.2: v2(72.517,41.148) 85.499,54.13 DS301.40
  Bottom Layer w0.2: J4.18 41.905,41.661 42.418,41.148 v2(72.517,41.148)
DOWN_BUTTON: D406.1 R411.1 SW402.B1 SW402.B2 | length 129.2
  Top Layer w0.2: SW402.B2 SW402.B1
  Bottom Layer w0.2: 57.05,23.015 58.773,23.015 61.468,20.32 140.716,20.32 143.821,17.215 D406.1 161.451,17.181 R411.1 168.431,17.181 SW402.B1
GND: C301.1 C302.1 C303.1 C304.1 C305.1 C306.1 D405.2 D406.2 D407.2 D408.2 D409.2 DS301.18 DS301.19 DS301.20 DS301.26 DS301.33 J1.16 J1.18 J1.20 J1.22 J2.23 J2.25 J2.27 J3.5 J3.7 J3.9 J4.5 MH1.1 MH2.1 MH3.1 MH4.1 pad.14@15,5 Q201.S Q202.S Q203.S Q204.S Q205.S Q206.S Q207.S Q208.S Q209.S Q401.S Q402.S Q403.S Q404.S Q405.S R210.2 R211.2 R212.2 R213.2 R214.2 R215.2 R216.2 R217.2 R218.2 R405.2 R407.1 R408.2 R409.2 R410.2 R411.2 R412.2 R413.2 R414.2 R415.2 | length 28
  Bottom Layer w0.5: Q405.S 25.756,12.004 R415.2 ; DS301.26 124.43,49.124 126.752,46.802 C302.1 C303.1 C304.1 C305.1 C306.1 ; DS301.18 DS301.19 DS301.20 ; R409.2@146.764,43.701 146.939,43.876 Q404.S
  other v1: 5,7.25 70,7.25 3,8 7,8 68,8 72,8 2.25,10 7.75,10 67.25,10 72.75,10 3,12 7,12 68,12 72,12 5,12.75 70,12.75 5,52.25 70,52.25 3,53 7,53 68,53 72,53 2.25,55 7.75,55 67.25,55 72.75,55 3,57 7,57 68,57 72,57 5,57.75 70,57.75
IMD_LED: J3.4 Q403.G R408.1 | length 19.7
  Top Layer w0.5: v2(14.859,22.86) 14.878,22.879 R408.1 14.937,22.906 17.711,22.906 Q403.G
  Bottom Layer w0.2: v2(14.859,22.86) 19.177,18.542 22.86,18.542 25.146,20.828 25.146,22.479 25.682,23.015 J3.4
LED_GREEN_1: Q203.G R212.1
LED_GREEN_2: J2.24 Q202.G R211.1 | length 39.9
  Top Layer w0.2: v2(34.29,16.764) 34.285,16.769 34.285,40.646 41.255,47.616 R211.1 43.057,47.616 43.533,48.092 Q202.G
  Bottom Layer w0.2: J2.24 34.285,16.759 v2(34.29,16.764)
LED_GREEN_3: J2.26 Q201.G R210.1 | length 47.6
  Top Layer w0.2: v2(33.02,16.764) 33.015,16.769 33.015,47.62 38.881,53.486 R210.1 ; R210.1@41.492,53.349 Q201.G@45.435,53.349
  Top Layer w0.5: R210.1 R210.1@41.492,53.349 ; Q201.G@45.435,53.349 Q201.G
  Bottom Layer w0.2: J2.26 33.015,16.759 v2(33.02,16.764)
LED_RED_1: J2.10 Q209.G R218.1 | length 15.9
  Top Layer w0.2: R218.1 41.382,6.521 40.005,7.898 40.005,12.573 41.021,13.589 v2(43.18,13.589) ; R218.1@41.619,6.384 Q209.G@45.435,6.384
  Top Layer w0.5: R218.1 R218.1@41.619,6.384 ; Q209.G@45.435,6.384 Q209.G
  Bottom Layer w0.2: J2.10 43.18,15.045 v2(43.18,13.589)
LED_RED_2: Q208.G R217.1 | length 0.1
  Top Layer w0.2: Q208.G@45.526,10.811 Q208.G
LED_RED_3: J2.14 Q207.G R216.1 | length 7.7
  Top Layer w0.2: v2(40.64,16.764) 40.64,17.526 41.311,18.197 R216.1 ; R216.1@42.983,18.254 Q207.G@45.502,18.254
  Top Layer w0.5: R216.1 R216.1@42.983,18.254 ; Q207.G@45.502,18.254 Q207.G
  Bottom Layer w0.2: J2.14 40.64,15.055 v2(40.64,16.764)
LED_YELLOW_1: J2.16 Q206.G R215.1 | length 14.7
  Top Layer w0.2: v2(39.37,16.764) 39.365,16.769 39.365,23.109 40.389,24.133 R215.1 Q206.G@45.128,24.133
  Top Layer w0.5: Q206.G@45.128,24.133 45.21,24.216 Q206.G
  Bottom Layer w0.2: J2.16 39.37,15.055 v2(39.37,16.764)
LED_YELLOW_2: J2.18 Q205.G R214.1 | length 20.6
  Top Layer w0.2: v2(38.1,16.764) 38.095,16.769 38.095,26.844 41.255,30.004 R214.1 ; R214.1@41.392,29.967 Q205.G@45.473,29.967
  Top Layer w0.5: R214.1 R214.1@41.392,29.967 ; Q205.G@45.473,29.967 Q205.G
  Bottom Layer w0.2: J2.18 38.1,15.055 v2(38.1,16.764)
LED_YELLOW_3: J2.20 Q204.G R213.1 | length 27
  Top Layer w0.2: v2(36.83,16.764) 36.825,16.769 36.825,31.444 41.255,35.874 R213.1 ; R213.1@41.432,35.952 Q204.G@45.435,35.952
  Top Layer w0.5: R213.1 R213.1@41.432,35.952 ; Q204.G@45.435,35.952 Q204.G
  Bottom Layer w0.2: J2.20 36.83,15.055 v2(36.83,16.764)
LEFT_BUTTON: D408.1 J1.24 R413.1 SW404.B1 SW404.B2 | length 120.9
  Top Layer w0.2: SW404.B1 SW404.B2
  Bottom Layer w0.2: J1.24 57.122,35.643 58.083,35.643 62.103,31.623 67.437,31.623 77.724,21.336 R413.1 143.694,21.393 D408.1 156.143,21.393 SW404.B1
NetC301_2: C301.2 DS301.32 | length 5.2
  Bottom Layer w0.5: C301.2 109.181,48.965 109.181,54.121 DS301.32
NetC302_2: C302.2 DS301.25 | length 5.4
  Bottom Layer w0.5: C302.2 126.961,48.711 126.961,54.121 DS301.25
NetC303_2: C303.2 DS301.24 | length 5.4
  Bottom Layer w0.5: C303.2 129.501,48.711 129.501,54.121 DS301.24
NetC304_2: C304.2 DS301.23 | length 5.4
  Bottom Layer w0.5: C304.2 132.041,48.711 132.041,54.121 DS301.23
NetC305_2: C305.2 DS301.22 | length 5.4
  Bottom Layer w0.5: C305.2 134.581,48.711 134.581,54.121 DS301.22
NetC306_2: C306.2 DS301.21 | length 5.4
  Bottom Layer w0.5: C306.2 137.121,48.711 137.121,54.121 DS301.21
NetC307_1: C307.1 DS301.30 | length 5.3
  Bottom Layer w0.5: C307.1 113.932,49.222 114.379,49.669 114.379,54.021 DS301.30
NetC307_2: C307.2 C308.2 DS301.31 | length 8.9
  Bottom Layer w0.5: C307.2 112.032,49.222 111.73,49.524 DS301.31 111.73,56.279 112.023,56.572 112.851,56.572 C308.2
NetC308_1: C308.1 DS301.29 | length 4.3
  Bottom Layer w0.5: C308.1 116.411,56.769 116.81,56.37 DS301.29
NetC309_1: C309.1 DS301.28 | length 3
  Bottom Layer w0.5: DS301.28 119.35,56.521 119.652,56.823 C309.1
NetC309_2: C309.2 DS301.27 | length 3
  Bottom Layer w0.5: C309.2 121.552,54.657 121.89,54.319 DS301.27
NetD201_K: D201.K R201.2 | length 9.3
  Top Layer w0.5: R201.2 54.218,52.097 54.543,51.772 54.643,51.772 55.148,51.267 D201.K
NetD202_K: D202.K R202.2 | length 9
  Top Layer w0.5: R202.2 54.35,46.192 62.94,46.192 D202.K
NetD203_K: D203.K R203.2 | length 9.2
  Top Layer w0.5: R203.2 54.218,40.349 54.543,40.024 54.648,40.024 54.836,39.837 D203.K
NetD204_K: D204.K R204.2 | length 9.4
  Top Layer w0.5: R204.2 54.218,34.476 54.543,34.151 54.643,34.151 55.139,33.655 62.279,33.655 62.301,33.677 62.881,33.677 D204.K
NetD205_K: D205.K R205.2 | length 9.2
  Top Layer w0.5: R205.2 54.218,28.602 54.543,28.277 54.643,28.277 55.021,27.899 D205.K
NetD206_K: D206.K R206.2 | length 9.5
  Top Layer w0.5: R206.2 54.218,22.728 54.543,22.403 54.643,22.403 55.329,21.717 62.279,21.717 62.301,21.739 62.881,21.739 D206.K
NetD207_K: D207.K R207.2 | length 9.3